# EAGLE board motorshieldv5_jd (EAGLE 5.06)
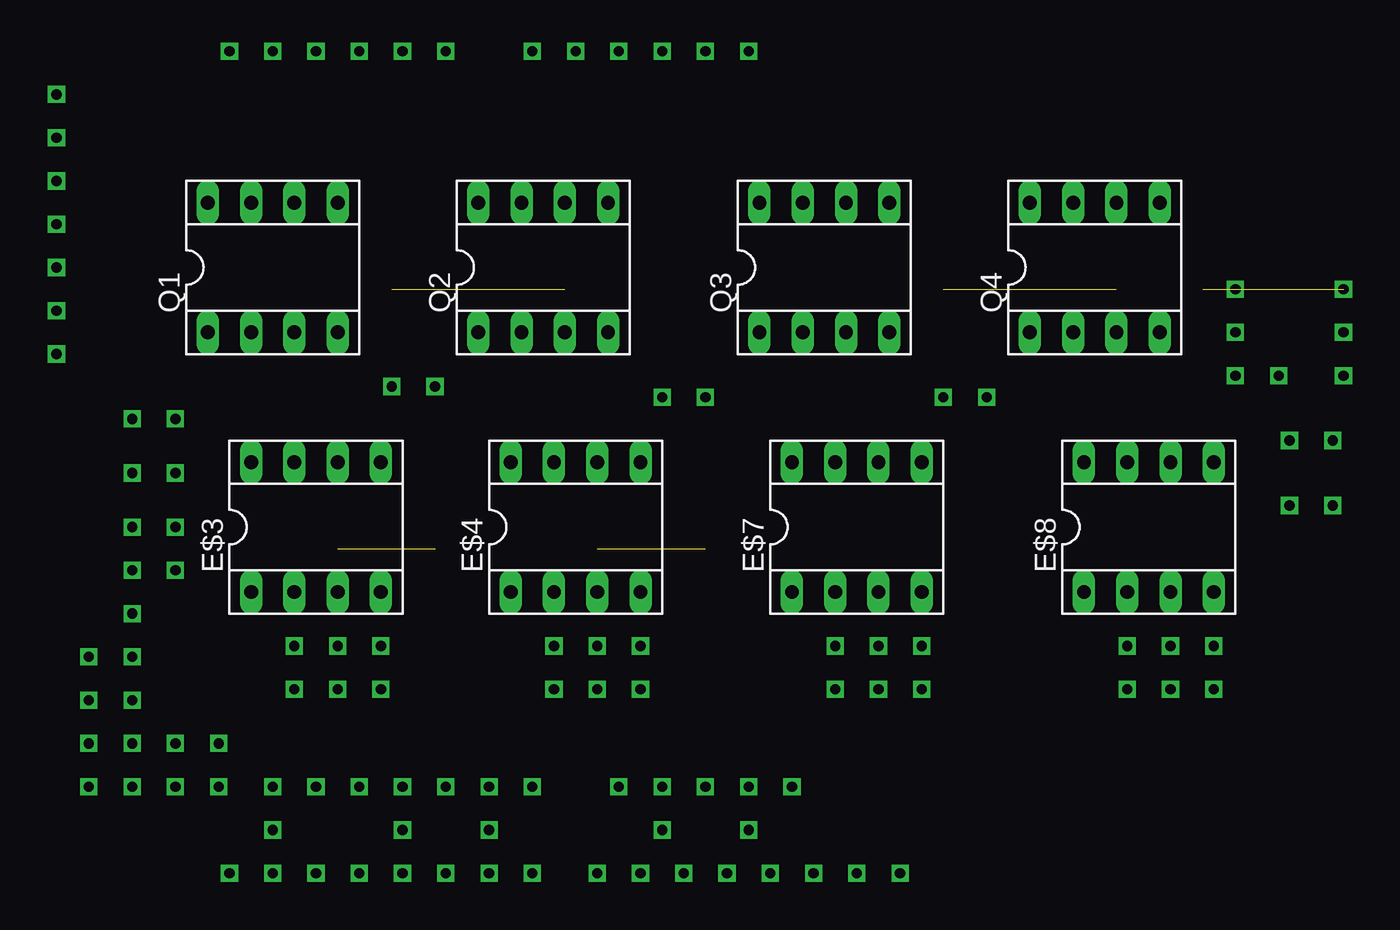
[diagram p0: board, top side]
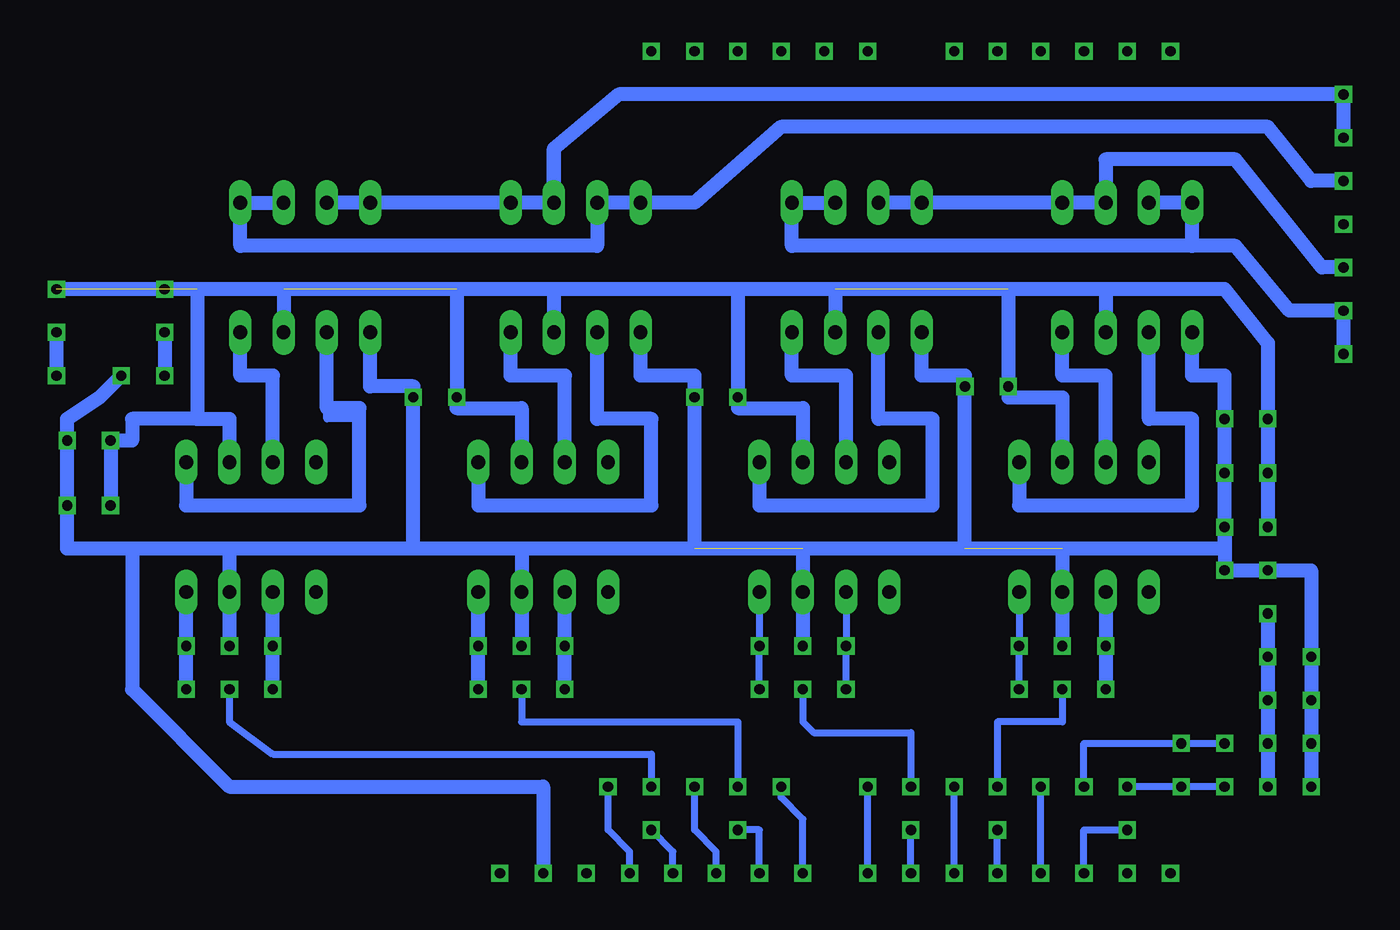
[diagram p1: board, bottom side, seen from below]

No outline drawn. Coordinates in mm, seen from the top.
Copper layers (1*16): Top 0.035mm / dielectric 1.5mm / Bottom 0.035mm
Design rules "default": minimum track width 10mil, minimum drill 24mil, track to track 8mil, track to pad 8mil, pad to pad 8mil, via to via 8mil, smd to smd 8mil, copper to edge 40mil, drill to drill 8mil, minimum pad ring 10mil, minimum via ring 8mil, stop-mask expansion 4mil, vias tented up to drill 0mil, thermal gap 10mil

## Footprints (pad centres in the part's own frame; a part is rotated, then mirrored left to right if it is on the bottom)
SOCKET-08 = drill 0.813 long: 1 -3.81,-3.81; 2 -1.27,-3.81; 3 1.27,-3.81; 4 3.81,-3.81; 5 3.81,3.81; 6 1.27,3.81; 7 -1.27,3.81; 8 -3.81,3.81

## Placement (x,y rotation side)
E$3  TC4427  [SOCKET-08]  25.4,40.64 0 top
E$4  TC4427  [SOCKET-08]  40.64,40.64 0 top
E$7  TC4427  [SOCKET-08]  57.15,40.64 0 top
E$8  TC4427  [SOCKET-08]  74.3,40.64 0 top
Q1  AOP610  [SOCKET-08]  22.86,55.88 0 top
Q2  AOP610  [SOCKET-08]  38.73,55.88 0 top
Q3  AOP610  [SOCKET-08]  55.24,55.88 0 top
Q4  AOP610  [SOCKET-08]  71.12,55.88 0 top

## Library data of the parts
E$3 E$4 E$7 E$8 Q1-Q4 = ic-package

## Nets
GND: E$3.3 E$4.3 E$7.3 E$8.3 Q1.1 Q2.1 Q3.1 Q4.1
S$1: E$3.5 Q1.2
S$3: E$3.7 Q1.4
S$6: E$4.7 Q2.4
S$7: E$4.5 Q2.2
S$11: Q3.7 Q3.8 Q4.5 Q4.6
S$12: Q1.7 Q1.8 Q2.5 Q2.6
S$13: E$3.2
S$15: E$3.4
S$16: Q3.6 Q4.7
S$18: E$7.5 Q3.2
S$22: E$7.7 Q3.4
S$23: E$8.7 Q4.4
S$28: E$8.5 Q4.2
S$29: E$4.2
S$31: E$4.4
S$32: E$7.2
S$34: E$7.4
S$35: E$8.2
S$39: Q1.6 Q2.7
S$41: E$8.4
VCC: E$3.6 E$4.6 E$7.6 E$8.6 Q1.3 Q2.3 Q3.3 Q4.3

## Tracks (layer width: path | path; a pad name or v marks a point on that pad's centre or on a via)
GND  (via drill 0.6)  (2 unrouted)
  Bottom 0.406: 84.45,47.62 85.09,46.99 v85.09,45.72 v85.09,41.91 85.09,39.37 | Q4.1 67.31,50.16 | v75.56,33.66 E$8.3 75.56,39.37 | v58.42,33.66 E$7.3 58.42,39.37 | v41.91,33.66 E$4.3 41.91,39.37 | 32.38,49.53 v32.38,48.9 32.38,39.37 | v26.67,33.66 E$3.3 26.67,39.37 | 17.14,49.53 v17.14,46.99 v17.14,43.81 v17.14,40.64
  Bottom 0.813: v81.92,49.53 83.19,48.26 85.09,46.99 85.09,39.37 81.28,39.37 | v57.15,20.32 57.15,25.4 75.56,25.4 81.28,31.11 81.28,39.37 | Q4.1 67.31,48.9 64.77,48.9 64.77,39.37 | 75.56,39.37 81.28,39.37 | 75.56,39.37 v75.56,33.66 | 64.77,39.37 75.56,39.37 | Q3.1 51.44,49.53 48.26,49.53 48.26,39.37 | 58.42,39.37 64.77,39.37 | 58.42,39.37 v58.42,33.66 | 48.26,39.37 58.42,39.37 | Q2.1 34.92,49.53 32.38,49.53 32.38,39.37 | Q1.1 19.05,49.53 17.14,49.53 v17.14,40.64 | 41.91,39.37 48.26,39.37 | 41.91,39.37 v41.91,33.66 | 32.38,39.37 41.91,39.37 | 26.67,39.37 32.38,39.37 | 26.67,39.37 v26.67,33.66 | 26.67,39.37 17.14,39.37 v17.14,40.64 | v17.14,38.1 v14.61,38.1 | v17.14,40.64 v17.14,38.1 | v17.14,38.1 12.06,38.1 v12.06,33.02 v12.06,25.4
S$1
  Bottom 0.813: E$3.5 29.21,41.91 19.05,41.91 19.05,46.99 21.59,46.99 Q1.2
S$2  (via drill 0.6)
  Bottom 0.406: v41.91,20.32 41.91,23.5 43.18,24.77 v43.18,25.4
S$3
  Bottom 0.813: E$3.7 24.13,49.53 26.67,49.53 Q1.4
S$4  (via drill 0.6)
  Bottom 0.406: v44.45,20.32 44.45,22.86 v45.72,22.86
S$5  (via drill 0.6)
  Bottom 0.406: v46.99,20.32 46.99,21.59 48.26,22.86 v48.26,25.4
S$6
  Bottom 0.813: Q2.4 42.55,49.53 39.37,49.53 E$4.7
S$7
  Bottom 0.813: E$4.5 44.45,41.91 34.29,41.91 34.29,46.99 37.47,46.99 Q2.2
S$8  (via drill 0.6)
  Bottom 0.406: v49.53,20.32 49.53,21.59 v50.8,22.86
S$9  (via drill 0.6)
  Bottom 0.406: v52.07,20.32 52.07,21.59 53.34,22.86 v53.34,25.4
S$10  (via drill 0.6)
  other vias: 54.61,20.32
S$11  (via drill 0.6)
  Bottom 0.406: Q4.5 Q4.6 | Q3.7 Q3.8 48.26,59.69
  Bottom 0.813: Q4.6 Q4.5 74.93,57.15 53.98,57.15 Q3.7 48.26,59.69 43.18,64.14 14.61,64.14 12.06,60.96 v10.16,60.96
S$12  (via drill 0.6)
  Bottom 0.406: Q2.5 Q2.6 | Q1.8 Q1.7 | v10.16,50.8 v10.16,53.34
  Bottom 0.813: v10.16,50.8 v10.16,53.34 13.34,53.34 16.51,57.15 19.05,57.15 | 19.05,57.15 Q1.8 Q1.7 | 19.05,57.15 42.55,57.15 Q2.5 Q2.6
S$13  (via drill 0.6)
  Bottom 0.406: E$3.2 v24.13,33.66 v24.13,31.11
  Bottom 0.813: E$3.2 v24.13,31.11
S$14  (via drill 0.6)
  Bottom 0.406: v26.67,31.11 26.67,29.21 30.48,29.21 v30.48,25.4
S$15  (via drill 0.6)
  Bottom 0.406: E$3.4 v29.21,33.66 v29.21,31.11
S$16  (via drill 0.6)
  Bottom 0.406: Q3.6 Q4.7 | 56.52,60.33 56.52,60.96 | v10.16,63.5 v10.16,66.04
  Bottom 0.813: Q4.7 Q3.6 56.52,62.87 | 56.52,62.87 52.7,66.04 v10.16,66.04 | 56.52,62.87 56.52,60.33 | v10.16,66.04 v10.16,63.5 v10.16,66.04
S$17  (via drill 0.6)
  other vias: 19.68,25.4
S$18
  Bottom 0.813: E$7.5 60.96,41.91 50.8,41.91 50.8,46.99 53.98,46.99 Q3.2
S$19  (via drill 0.6)
  other vias: 19.68,27.94
S$20  (via drill 0.6)
  Bottom 0.406: v25.4,25.4 25.4,27.94 v17.14,27.94
S$21  (via drill 0.6)
  other vias: 10.16,58.42
S$22
  Bottom 0.406: Q3.4 59.05,50.16
  Bottom 0.813: E$7.7 55.88,49.53 59.05,49.53 Q3.4
S$23
  Bottom 0.406: Q4.4 74.93,50.16
  Bottom 0.813: E$8.7 73.03,49.53 74.93,49.53 Q4.4
S$25  (via drill 0.6)
  Bottom 0.406: v14.61,25.4 v14.61,30.48
  Bottom 0.813: v14.61,35.56 v14.61,33.02 v14.61,25.4
S$26  (via drill 0.6)
  other vias: 50.8,68.58
S$27  (via drill 0.6)
  other vias: 45.72,68.58
S$28
  Bottom 0.406: 67.94,41.91 67.94,46.99 69.85,46.99 Q4.2
  Bottom 0.813: E$8.5 78.11,41.91 67.94,41.91 67.94,47.62 69.85,47.62 Q4.2
S$29  (via drill 0.6)
  Bottom 0.406: E$4.2 v39.37,33.66 v39.37,31.11
S$30  (via drill 0.6)
  Bottom 0.406: v41.91,31.11 41.91,29.21 41.27,28.57 35.56,28.57 v35.56,25.4
S$31  (via drill 0.6)
  Bottom 0.406: E$4.4 v44.45,33.66 v44.45,31.11
S$32  (via drill 0.6)
  Bottom 0.406: E$7.2 v55.88,33.66 v55.88,31.11
  Bottom 0.813: v55.88,31.11 E$7.2
S$33  (via drill 0.6)
  Bottom 0.406: v58.42,31.11 58.42,29.21 45.72,29.21 v45.72,25.4
S$34  (via drill 0.6)
  Bottom 0.406: E$7.4 v60.96,33.66 v60.96,31.11
  Bottom 0.813: v60.96,31.11 E$7.4
S$35  (via drill 0.6)
  Bottom 0.406: E$8.2 v73.03,33.66 v73.03,31.11
  Bottom 0.813: v73.03,31.11 E$8.2
S$36  (via drill 0.6)
  Bottom 0.406: v75.56,31.11 75.56,29.21 73.03,27.3 50.8,27.3 v50.8,25.4
S$37  (via drill 0.6)
  Bottom 0.406: v79.38,52.07 v79.38,49.53
  Bottom 0.813: v79.38,52.07 v79.38,49.53
S$38  (via drill 0.6)
  other vias: 79.38,54.61
S$39  (via drill 0.6)
  Bottom 0.406: Q1.6 Q2.7
  Bottom 0.813: v10.16,55.88 11.43,55.88 16.51,62.23 24.13,62.23 Q1.6 Q2.7
S$41  (via drill 0.6)
  Bottom 0.406: E$8.4 v78.11,33.66 v78.11,31.11
  Bottom 0.813: v78.11,31.11 E$8.4
S$42  (via drill 0.6)
  other vias: 48.26,48.26
S$44  (via drill 0.6)
  other vias: 62.23,48.26
S$45  (via drill 0.6)
  other vias: 64.77,48.26
S$46  (via drill 0.6)
  other vias: 14.61,46.99
S$47  (via drill 0.6)
  other vias: 48.26,68.58
S$48  (via drill 0.6)
  Bottom 0.406: v85.72,49.53 v85.72,52.07
  Bottom 0.813: v85.72,52.07 v85.72,49.53
S$49  (via drill 0.6)
  other vias: 43.18,68.58
S$50  (via drill 0.6)
  other vias: 40.64,68.58
S$51  (via drill 0.6)
  other vias: 38.1,68.58
S$52  (via drill 0.6)
  other vias: 33.02,68.58
S$53  (via drill 0.6)
  other vias: 30.48,68.58
S$54  (via drill 0.6)
  other vias: 27.94,68.58
S$55  (via drill 0.6)
  other vias: 25.4,68.58
S$56  (via drill 0.6)
  other vias: 22.86,68.58
S$57  (via drill 0.6)
  other vias: 20.32,68.58
S$58  (via drill 0.6)
  Bottom 0.406: v38.1,20.32 v38.1,25.4
S$59  (via drill 0.6)
  Bottom 0.406: v33.02,20.32 v33.02,25.4
S$60  (via drill 0.6)
  Bottom 0.406: v35.56,20.32 v35.56,22.86
S$61  (via drill 0.6)
  Bottom 0.406: v30.48,20.32 v30.48,22.86
S$62  (via drill 0.6)
  Bottom 0.406: v27.94,20.32 v27.94,25.4
S$63  (via drill 0.6)
  Bottom 0.406: v25.4,20.32 25.4,22.86 v22.86,22.86
S$64  (via drill 0.6)
  other vias: 22.86,20.32
S$65  (via drill 0.6)
  other vias: 20.32,20.32
S$74  (via drill 0.6)
  other vias: 59.69,20.32
S$77  (via drill 0.6)
  other vias: 12.06,30.48
S$78  (via drill 0.6)
  other vias: 14.61,27.94
S$80  (via drill 0.6)
  other vias: 12.06,27.94
S$83  (via drill 0.6)
  Bottom 0.406: v17.14,25.4 v22.86,25.4
VCC  (via drill 0.6)  (3 unrouted)
  Bottom 0.406: v82.55,45.72 v82.55,41.91 | 72.39,54.61 77.47,54.61 | E$3.6 26.67,46.35 | 45.72,47.62 v45.72,48.26 45.72,54.61 | 29.84,48.26 v29.84,48.9 29.84,54.61 | v14.61,40.64 v14.61,43.81
  Bottom 0.813: v82.55,41.91 v82.55,45.72 81.28,45.72 81.28,46.99 77.47,46.99 | E$8.6 75.56,46.99 77.47,46.99 | 77.47,46.99 77.47,54.61 v85.72,54.61 72.39,54.61 | E$7.6 58.42,47.62 62.23,47.62 62.23,54.61 | 72.39,54.61 Q4.3 | 62.23,54.61 72.39,54.61 | E$4.6 41.91,47.62 45.72,47.62 45.72,54.61 | 56.52,54.61 62.23,54.61 | 56.52,54.61 Q3.3 | 45.72,54.61 56.52,54.61 | E$3.6 26.67,48.26 29.84,48.26 29.84,54.61 | 40.01,54.61 45.72,54.61 | 40.01,54.61 Q2.3 | 29.84,54.61 40.01,54.61 | 24.13,54.61 29.84,54.61 | 24.13,54.61 Q1.3 | 24.13,54.61 17.14,54.61 14.61,51.44 v14.61,43.81 v14.61,40.64